# EAGLE board PCB PANEL Control V1 (EAGLE 6.1)
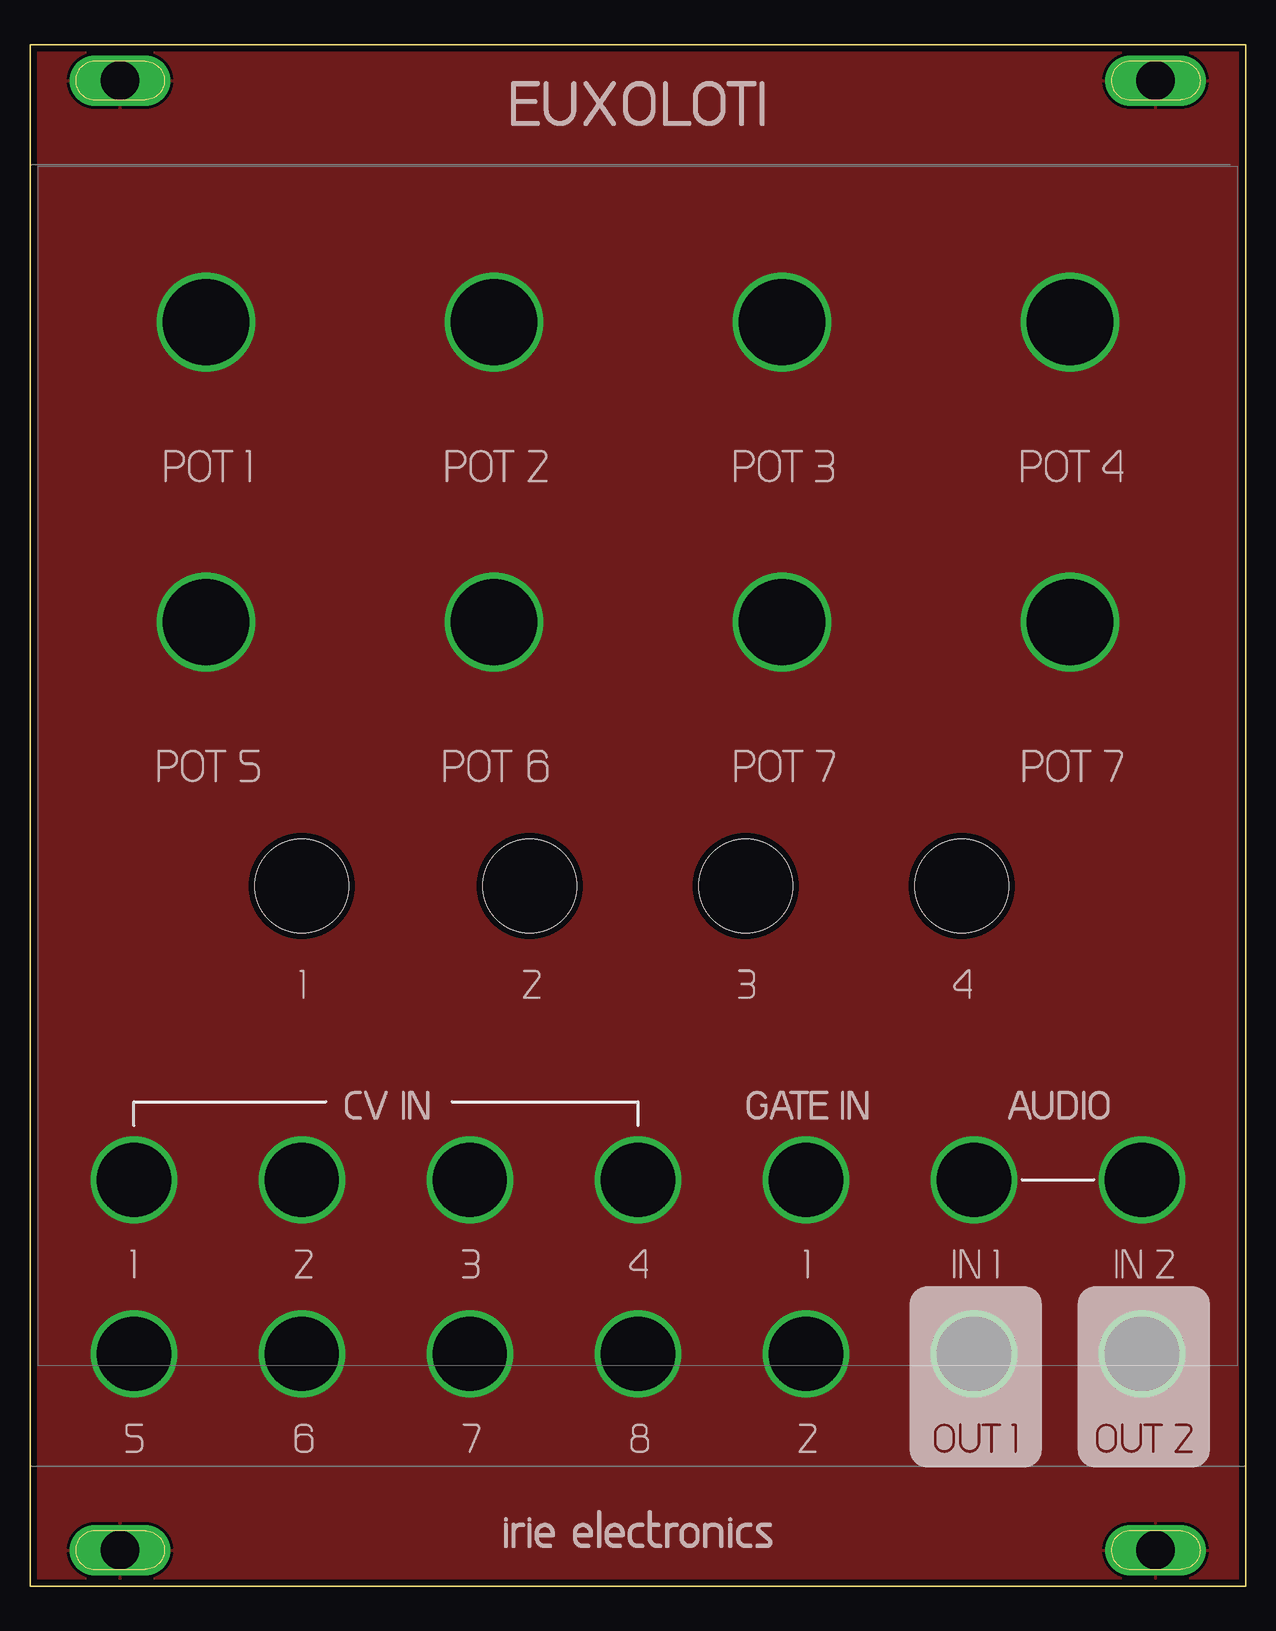
[diagram p0: board, top side]
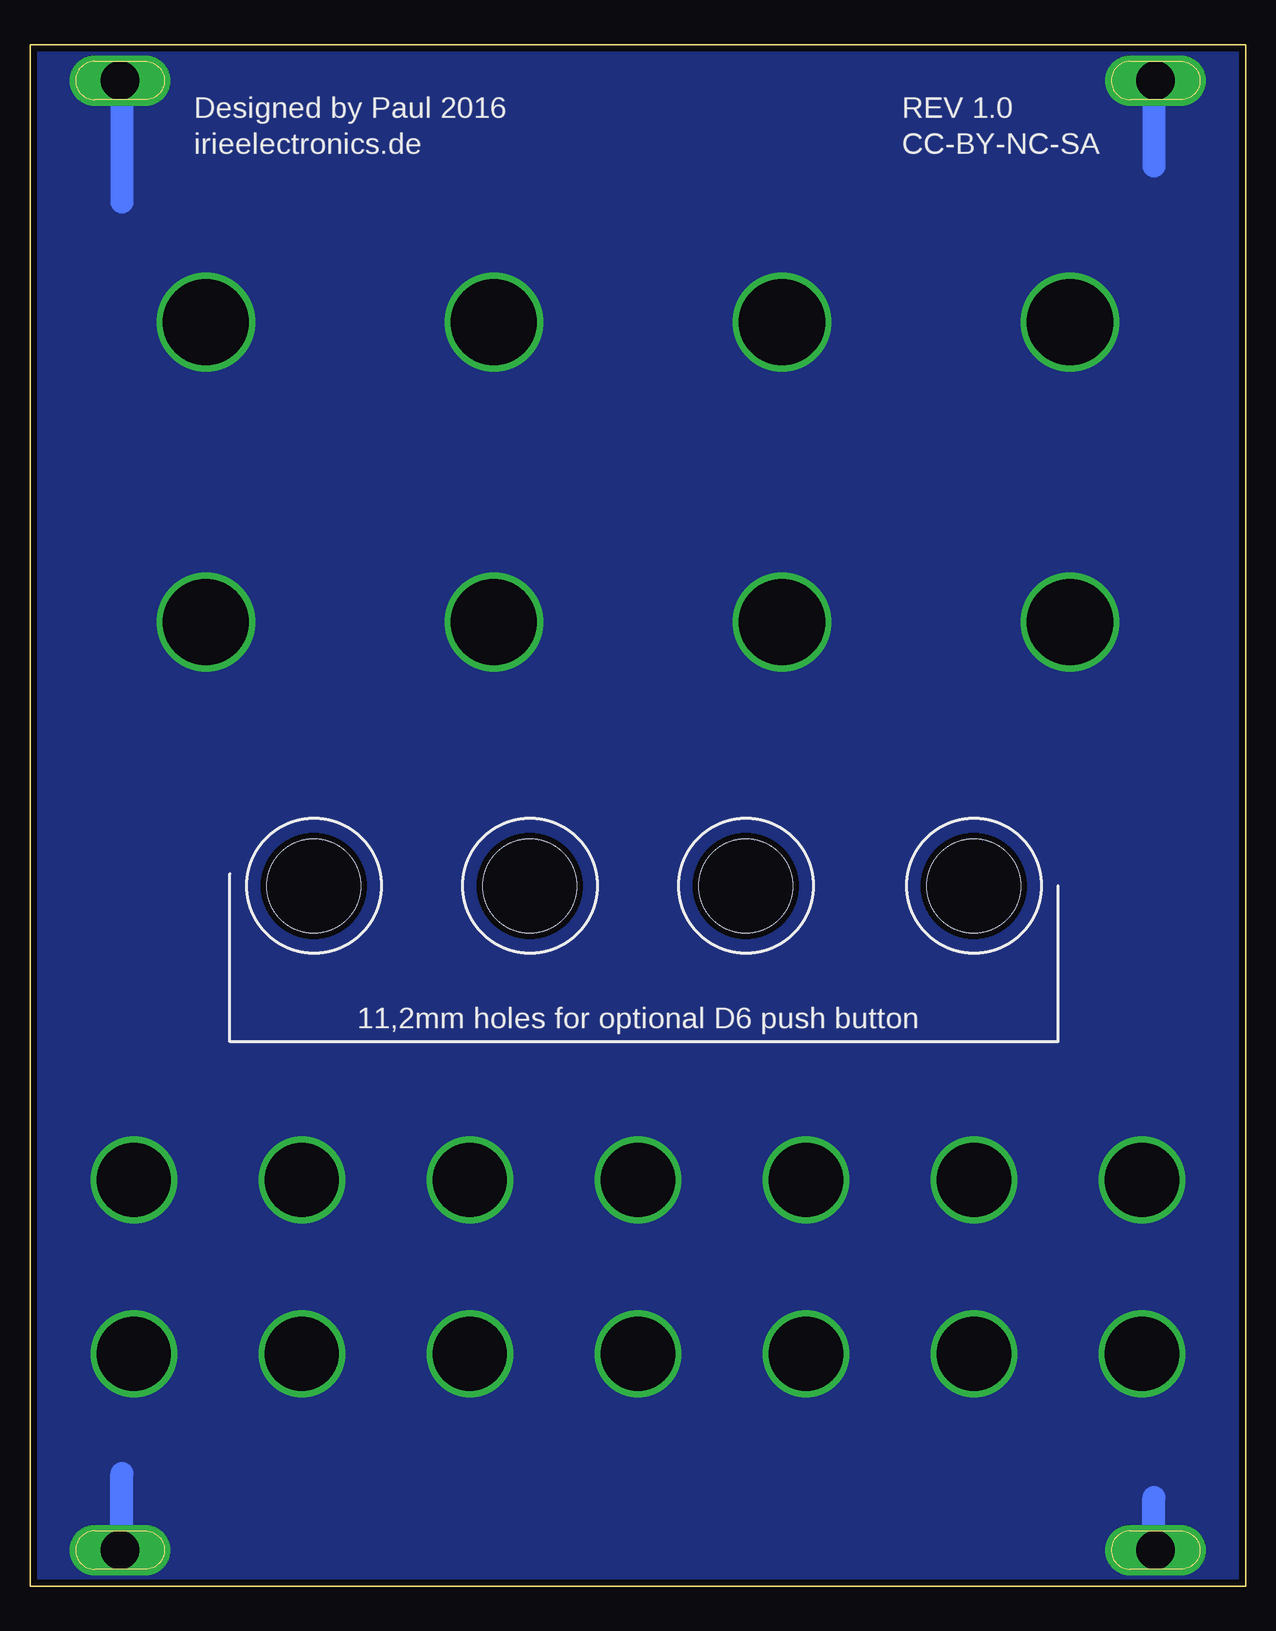
[diagram p1: board, bottom side, seen from below]

Size 101.3 x 128.5 mm. Coordinates in mm from the lower left corner, seen from the top.
Copper layers (1*2*15*16): Top 0.035mm / dielectric 0.2mm / Route2 0.035mm / dielectric 1.2mm / Route15 0.035mm / dielectric 0.2mm / Bottom 0.035mm
Design rules: minimum track width 6mil, minimum drill 12mil, track to track 6mil, track to pad 8mil, pad to pad 12mil, via to via 6mil, smd to smd 0mil, copper to edge 20mil, drill to drill 10mil, minimum pad ring 6mil, minimum via ring 6mil, stop-mask expansion 0mil, vias tented up to drill 100mil, thermal gap 10mil
Holes 7.8 mm at 22.65,58.36 41.65,58.36 59.65,58.36 77.65,58.36

## Footprints (pad centres in the part's own frame; a part is rotated, then mirrored left to right if it is on the bottom)
MOUNTING_HOLE-3.2 = drill 3.2 long: GND 0,0

## Placement (x,y rotation side)
ARTWORK  [LABEL_EUXOLOTI_PANEL]  0,-0.14 0 top
PANEL_OUTLINE  [CONTROL_PCB_PANEL]  0,0 0 top
U$1  MOUNTING_SLOT  [MOUNTING_HOLE-3.2]  7.5,3 0 top
U$2  MOUNTING_SLOT  [MOUNTING_HOLE-3.2]  93.8,3 0 top
U$3  MOUNTING_SLOT  [MOUNTING_HOLE-3.2]  7.5,125.5 0 top
U$4  MOUNTING_SLOT  [MOUNTING_HOLE-3.2]  93.8,125.5 0 top

## Library data of the parts
ARTWORK = labels links
PANEL_OUTLINE U$1-U$4 = EURORACK PANELS

## Nets
GND: U$1.GND U$2.GND U$3.GND U$4.GND

## Tracks (layer width: path | path; a pad name or v marks a point on that pad's centre or on a via)
GND  (via drill 6.2, 7.2)
  Bottom 1.93: U$3.GND 7.65,125.5 7.65,118.36 | U$4.GND 93.65,125.5 93.65,115.36 | U$1.GND 7.65,3 7.65,7.36 | U$2.GND 93.65,3 93.65,9.36
  other vias: 14.65,105.36 38.65,105.36 62.65,105.36 86.65,105.36 14.65,80.36 38.65,80.36 62.65,80.36 86.65,80.36 8.65,33.86 22.65,33.86 36.65,33.86 50.65,33.86 64.65,33.86 78.65,33.86 92.65,33.86 8.65,19.36 22.65,19.36 36.65,19.36 50.65,19.36 64.65,19.36 78.65,19.36 92.65,19.36
  pour Bottom (rank 4, no thermals): -5.85,133.37 -5.85,-5.64 107.15,-5.64 107.15,133.37
  pour Top: 105.15,130.37 -3.85,130.37 -3.85,-5.64 105.15,-5.64

## Text on the board
bNames: REV 1.0 | Designed by Paul 2016 | CC-BY-NC-SA | irieelectronics.de | 11,2mm holes for optional D6 push button